# EAGLE board gnd-station_jlangl_prod (EAGLE 9.7.0)
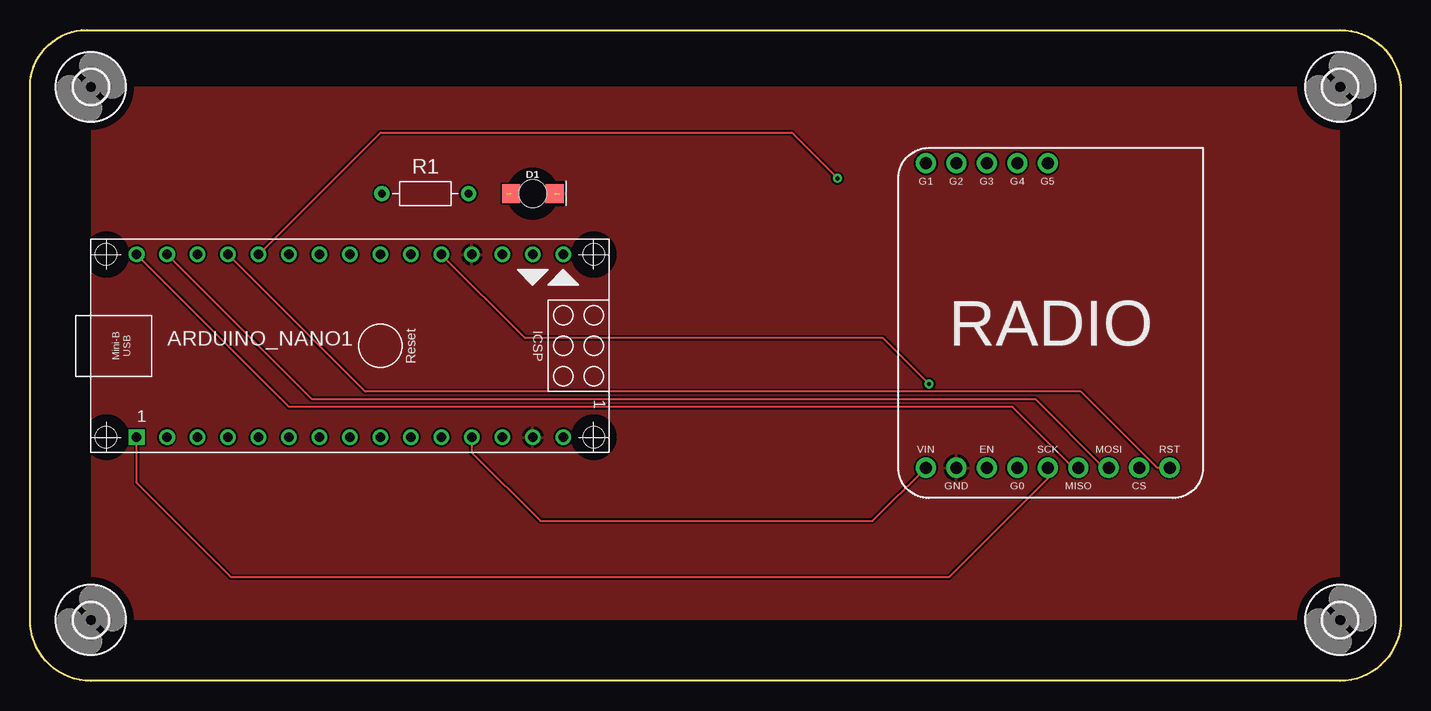
[diagram p0: board, top side]
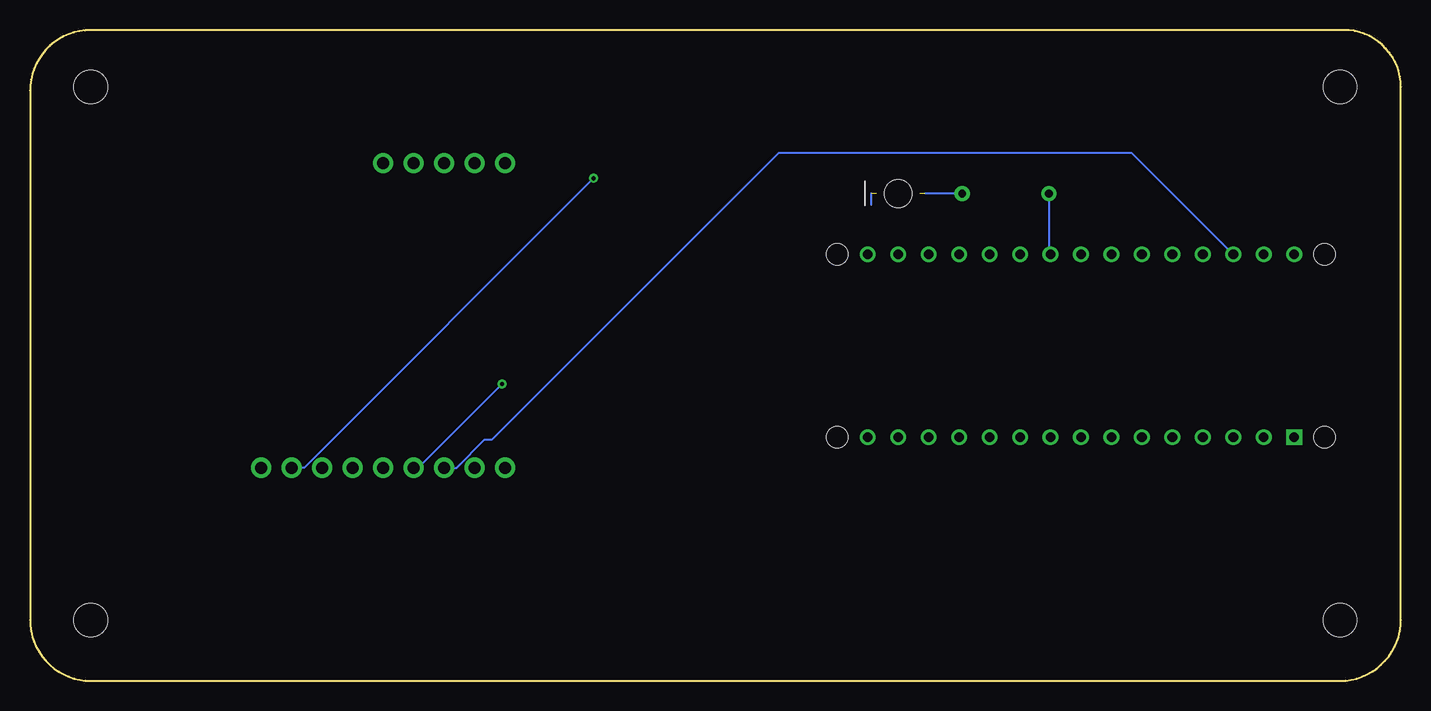
[diagram p1: board, bottom side, seen from below]

Size 114.28 x 54.28 mm. Coordinates in mm from the lower left corner, seen from the top.
Outline: 0,49.53 arc-90 4.75,54.28 109.22,54.28 arc-90 114.28,49.22 114.28,5.08 arc-90 109.2,0 5.08,0 arc-90 0,5.08 0,49.53
Copper layers (1*16): Top 0.035mm / dielectric 1.5mm / Bottom 0.035mm
Design rules "default": minimum track width 6mil, minimum drill 0.35mm, track to track 6mil, track to pad 6mil, pad to pad 6mil, via to via 6mil, smd to smd 6mil, copper to edge 40mil, drill to drill 6mil, minimum pad ring 10mil, minimum via ring 8mil, stop-mask expansion 4mil, vias tented up to drill 0mil, thermal gap 10mil

## Footprints (pad centres in the part's own frame; a part is rotated, then mirrored left to right if it is on the bottom)
ARDUINO_NANO = drill 0.8 square: 1 -20.32,-7.62 | drill 0.8: 2 -17.78,-7.62; 3 -15.24,-7.62; 4 -12.7,-7.62; 5 -10.16,-7.62; 6 -7.62,-7.62; 7 -5.08,-7.62; 8 -2.54,-7.62; 9 0,-7.62; 10 2.54,-7.62; 11 5.08,-7.62; 12 7.62,-7.62; 13 10.16,-7.62; 14 12.7,-7.62; 15 15.24,-7.62; 16 15.24,7.62; 17 12.7,7.62; 18 10.16,7.62; 19 7.62,7.62; 20 5.08,7.62; 21 2.54,7.62; 22 0,7.62; 23 -2.54,7.62; 24 -5.08,7.62; 25 -7.62,7.62; 26 -10.16,7.62; 27 -12.7,7.62; 28 -15.24,7.62; 29 -17.78,7.62; 30 -20.32,7.62 | hole 1.778: -22.86,-7.62; -22.86,7.62; 17.78,7.62; 17.78,-7.62
LED-1206-BOTTOM = smd 1.5 x 1.6: A -1.8,0; C 1.8,0 | hole 2.3: 0,0
2,8 = hole 2.8: 0,0
RESAD724W46L381D178B = drill 0.66 pad 1.26: 1 -3.62,0; 2 3.62,0
ADAFRUIT_RFM95W_LORA_RADIO = drill 1 pad 1.676: 1 2.29,-26.67; 2 4.83,-26.67; 3 7.37,-26.67; 4 9.91,-26.67; 5 12.45,-26.67; 6 14.99,-26.67; 7 17.53,-26.67; 8 20.07,-26.67; 9 22.61,-26.67; 10 2.29,-1.27; 11 4.83,-1.27; 12 7.37,-1.27; 13 9.91,-1.27; 14 12.45,-1.27

## Placement (x,y rotation side)
ARDUINO_NANO1  [ARDUINO_NANO]  29.21,27.94 0 top
D1  [LED-1206-BOTTOM]  41.91,40.64 0 top
H1  MOUNT-HOLE2.8  [2,8]  5.08,49.53 0 top
H2  MOUNT-HOLE2.8  [2,8]  109.22,49.53 0 top
H3  MOUNT-HOLE2.8  [2,8]  109.22,5.08 0 top
H4  MOUNT-HOLE2.8  [2,8]  5.08,5.08 0 top
R1  220  [RESAD724W46L381D178B]  32.95,40.64 0 top
U1  ADAFRUIT_RFM95W_LORA_RADIO  [ADAFRUIT_RFM95W_LORA_RADIO]  72.39,44.45 0 top

## Library data of the parts
ARDUINO_NANO1 = ArduinoNanoV30
D1 = SparkFun-LED
H1-H4 = holes
R1 = Resistor; CATEGORY: Resistor; SUB-CATEGORY: Fixed
U1 = AERO_Eagle_Library

## Nets
CS: ARDUINO_NANO1.26 U1.8
EN: ARDUINO_NANO1.28 U1.3
G0: ARDUINO_NANO1.20 U1.4
GND: ARDUINO_NANO1.14 ARDUINO_NANO1.19 D1.C U1.2
LED1: ARDUINO_NANO1.22 R1.1
LORA3.3V: ARDUINO_NANO1.12 U1.1
MISO: ARDUINO_NANO1.30 U1.6
MOSI: ARDUINO_NANO1.29 U1.7
N$2: D1.A R1.2
RST: ARDUINO_NANO1.27 U1.9
SCK: ARDUINO_NANO1.1 U1.5
VIN: ARDUINO_NANO1.15

## Tracks (layer width: path | path; a pad name or v marks a point on that pad's centre or on a via)
CS  (via drill 0.35)
  Top 0.152: ARDUINO_NANO1.26 29.21,45.72 63.5,45.72 v67.31,41.91
  Bottom 0.152: v67.31,41.91 91.44,17.78 U1.8
EN
  Bottom 0.152: ARDUINO_NANO1.28 22.45,44.04 51.85,44.04 75.77,20.12 76.39,20.12 78.73,17.78 U1.3
G0  (via drill 0.35)
  Top 0.152: ARDUINO_NANO1.20 41.27,28.57 71.12,28.57 v74.93,24.77
  Bottom 0.152: v74.93,24.77 81.92,17.78 U1.4
GND  (1 unrouted)
  Top 0.152: U1.2 76.83,17.78
  Bottom 0.152: 44.15,39.71 44.15,40.64
  pour Top: 5.16,49.45 5.16,4.42 5.18,4.47 5.18,4.48 5.18,4.48 5.19,4.49 5.19,4.5 5.31,4.66 5.31,4.67 5.32,4.68 5.32,4.68 5.33,4.69 5.47,4.83 5.48,4.84 5.48,4.84 5.49,4.85 5.5,4.85 5.66,4.97 5.67,4.97 5.68,4.98 5.68,4.98 5.69,4.98 5.88,5.07 5.88,5.07 5.89,5.08 5.9,5.08 5.9,5.08 6.1,5.13 6.11,5.14 6.12,5.14 6.12,5.14 6.13,5.14 6.33,5.15 6.33,5.16 6.35,5.16 6.36,5.16 6.36,5.16 109.14,5.16 109.14,49.45
LED1
  Bottom 0.152: R1.1 29.33,35.68 ARDUINO_NANO1.22
LORA3.3V
  Top 0.152: ARDUINO_NANO1.12 36.83,19.05 42.55,13.34 70.23,13.34 U1.1
  Bottom 0.152: U1.1 74.3,17.78
MISO
  Top 0.152: ARDUINO_NANO1.30 21.59,22.86 81.92,22.86 87,17.78 U1.6
MOSI
  Top 0.152: ARDUINO_NANO1.29 23.5,23.5 83.82,23.5 89.53,17.78 U1.7
N$2  (1 unrouted)
  Bottom 0.152: R1.2 39.67,40.64
RST
  Top 0.152: ARDUINO_NANO1.27 27.94,24.13 87.62,24.13 93.97,17.78 U1.9
SCK
  Top 0.152: U1.5 84.84,16.89 76.59,8.65 16.75,8.65 8.89,16.51 ARDUINO_NANO1.1